# EAGLE board Minduino_all headers (EAGLE 6.2)

Size 77.47 x 45.72 mm. Coordinates in mm from the lower left corner, seen from the top.
Outline: 0,0 77.47,0 77.47,45.72 0,45.71 0,0
Copper layers (1*16): Top 0.035mm / dielectric 1.5mm / Bottom 0.035mm
Design rules: minimum track width 10mil, minimum drill 24mil, track to track 8mil, track to pad 8mil, pad to pad 8mil, via to via 8mil, smd to smd 8mil, copper to edge 40mil, drill to drill 8mil, minimum pad ring 10mil, minimum via ring 8mil, stop-mask expansion 4mil, vias tented up to drill 0mil, thermal gap 10mil

## Footprints (pad centres in the part's own frame; a part is rotated, then mirrored left to right if it is on the bottom)
E2,5-5 = drill 0.813 pad 1.6: + -1.27,0 | drill 0.813 pad 1.6 octagon: - 1.27,0
DIL28-3 = drill 0.813 long: 1 -16.51,-3.81; 2 -13.97,-3.81; 3 -11.43,-3.81; 4 -8.89,-3.81; 5 -6.35,-3.81; 6 -3.81,-3.81; 7 -1.27,-3.81; 8 1.27,-3.81; 9 3.81,-3.81; 10 6.35,-3.81; 11 8.89,-3.81; 12 11.43,-3.81; 13 13.97,-3.81; 14 16.51,-3.81; 15 16.51,3.81; 16 13.97,3.81; 17 11.43,3.81; 18 8.89,3.81; 19 6.35,3.81; 20 3.81,3.81; 21 1.27,3.81; 22 -1.27,3.81; 23 -3.81,3.81; 24 -6.35,3.81; 25 -8.89,3.81; 26 -11.43,3.81; 27 -13.97,3.81; 28 -16.51,3.81
TO220H = drill 1.118 long: 1 -2.54,-10.16; 2 0,-10.16; 3 2.54,-10.16 | hole 3.302: 0,4.826
SPC4078 = drill 0.8 pad 2.184 long: 1 -3,0; 2 0,-4.8 | drill 1 pad 2.184 long: 3 3,0
1X14 = drill 1.016 long: 1 -16.51,0; 2 -13.97,0; 3 -11.43,0; 4 -8.89,0; 5 -6.35,0; 6 -3.81,0; 7 -1.27,0; 8 1.27,0; 9 3.81,0; 10 6.35,0; 11 8.89,0; 12 11.43,0; 13 13.97,0; 14 16.51,0
LED5MM = drill 0.813 octagon: A -1.27,0; K 1.27,0
MA03-1 = drill 1.016 long: 1 -2.54,0; 2 0,0; 3 2.54,0
0204/5 = drill 0.813 octagon: 1 -2.54,0; 2 2.54,0
22-23-2021 = drill 1 long: 1 -1.27,0; 2 1.27,0
MA07-1 = drill 1.016 long: 1 -7.62,0; 2 -5.08,0; 3 -2.54,0; 4 0,0; 5 2.54,0; 6 5.08,0; 7 7.62,0

## Placement (x,y rotation side)
C1  10µF  [E2,5-5]  20.32,17.78 0 top
C2  10µF  [E2,5-5]  27.94,17.78 180 top
IC1  MEGA8-P  [DIL28-3]  52.07,21.59 0 top
IC2  7805T  [TO220H]  24.13,33.02 0 top
J1  BARREL JACK  [SPC4078]  6.35,17.78 0 top
JP1  [1X14]  52.07,13.97 0 top
JP2  [1X14]  52.07,29.21 180 top
LED1  5MM  [LED5MM]  27.94,10.16 180 top
POT1  F  [MA03-1]  48.26,36.83 0 top
POT2  F  [MA03-1]  38.1,36.83 180 top
PRGM  F  [MA03-1]  38.1,6.35 0 top
PWM1  F  [MA03-1]  66.04,6.35 0 top
PWM2  F  [MA03-1]  55.88,6.35 0 top
R1  330  [0204/5]  24.13,15.24 270 top
S1  22-23-2021  [22-23-2021]  13.97,17.78 0 top
S2  [MA07-1]  63.5,36.83 180 top

## Library data of the parts
C1 C2 R1 = resistor
IC1 = atmel; OC_FARNELL: unknown; OC_NEWARK: unknown
IC2 = linear
J1 = con-jack; OC_FARNELL: unknown; OC_NEWARK: unknown
JP1 JP2 = pinhead
LED1 = led
POT1 POT2 PRGM PWM1 PWM2 S2 = con-lstb; OC_FARNELL: unknown; OC_NEWARK: unknown
S1 = con-molex; MF: MOLEX; MPN: 22-23-2021; OC_FARNELL: 1462926; OC_NEWARK: 25C3832

## Nets
2: IC1.2 JP1.2 PRGM.2
3: IC1.3 JP1.3 PRGM.3
4: IC1.4 JP1.4
5: IC1.5 JP1.5
6: IC1.6 JP1.6
9: IC1.9 JP1.9
10: IC1.10 JP1.10
11: IC1.11 JP1.11 PWM2.1
12: IC1.12 JP1.12 PWM1.1
13: IC1.13 JP1.13
14: IC1.14 JP1.14 S2.1
15: IC1.15 JP2.1 S2.2
16: IC1.16 JP2.2 S2.3
17: IC1.17 JP2.3 S2.4
18: IC1.18 JP2.4 S2.5
19: IC1.19 JP2.5 S2.6
23: IC1.23 JP2.9 POT1.1
24: IC1.24 JP2.10 POT2.1
25: IC1.25 JP2.11
26: IC1.26 JP2.12
27: IC1.27 JP2.13
28: IC1.28 JP2.14
+5V: C2.+ IC1.7 IC1.20 IC1.21 IC2.3 JP1.7 JP2.6 JP2.7 LED1.A POT1.2 POT2.2 PWM1.2 PWM2.2
GND: C1.- C2.- IC1.8 IC1.22 IC2.2 J1.1 J1.2 JP1.8 JP2.8 POT1.3 POT2.3 PWM1.3 PWM2.3 R1.1 S2.7
N$2: LED1.K R1.2
N$5: C1.+ IC2.1 S1.2
N$13: J1.3 S1.1
RST: IC1.1 JP1.1 PRGM.1

## Tracks (layer width: path | path; a pad name or v marks a point on that pad's centre or on a via)
2  (2 unrouted)
3  (2 unrouted)
4  (1 unrouted)
5  (1 unrouted)
6  (1 unrouted)
9  (1 unrouted)
10  (1 unrouted)
11  (2 unrouted)
12  (2 unrouted)
13  (1 unrouted)
14  (2 unrouted)
15  (2 unrouted)
16  (2 unrouted)
17  (2 unrouted)
18  (2 unrouted)
19  (2 unrouted)
23  (2 unrouted)
24  (2 unrouted)
25  (1 unrouted)
26  (1 unrouted)
27  (1 unrouted)
28  (1 unrouted)
+5V  (12 unrouted)
GND  (14 unrouted)
N$2  (1 unrouted)
N$5  (2 unrouted)
N$13  (1 unrouted)
RST  (2 unrouted)

## Text on the board
_tsilk: GND | +5V | A1 | A0 | +5V | GND | GND | D13 | D12 | ~D11 | ~D10 | ~D9 | D8 | A5 | A4 | A3 | A2 | A1 | A0 | GND | AREF | AVCC | D13 | D12 | ~D11 | ~D10 | ~D9 | IC2 | 7805T | J1 | ATMEGA328 | S1 | IC1 | C2 | 330 | R1 | C1 | LED1 | D2 | ~D3 | D4 | VCC | GND | CLK | CLK | ~D5 | ~D6 | D7 | D8 | RESET | D0 (RX) | D1 (TX) | PRGM | ~D5 | +5V | GND | ~D6 | +5V | GND